# Altium PCB Arm.PcbDoc
Units mil, origin at the board's own origin, x right, y up, seen from the top; angles counter-clockwise.
Board outline 6000 x 4000 mil, 2 copper layers (Top Layer, Bottom Layer); 132 components, 95 nets, 448 pads, 0 vias.
Unrouted connection lines stored in the file: 293.
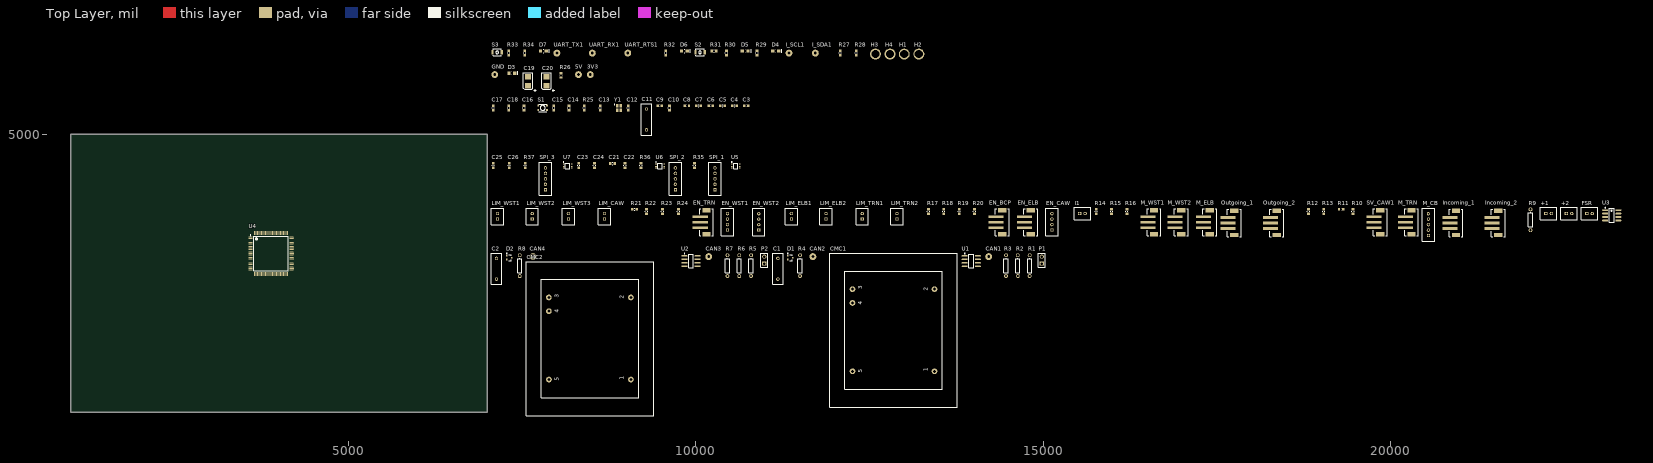
[diagram p0: Top Layer view]
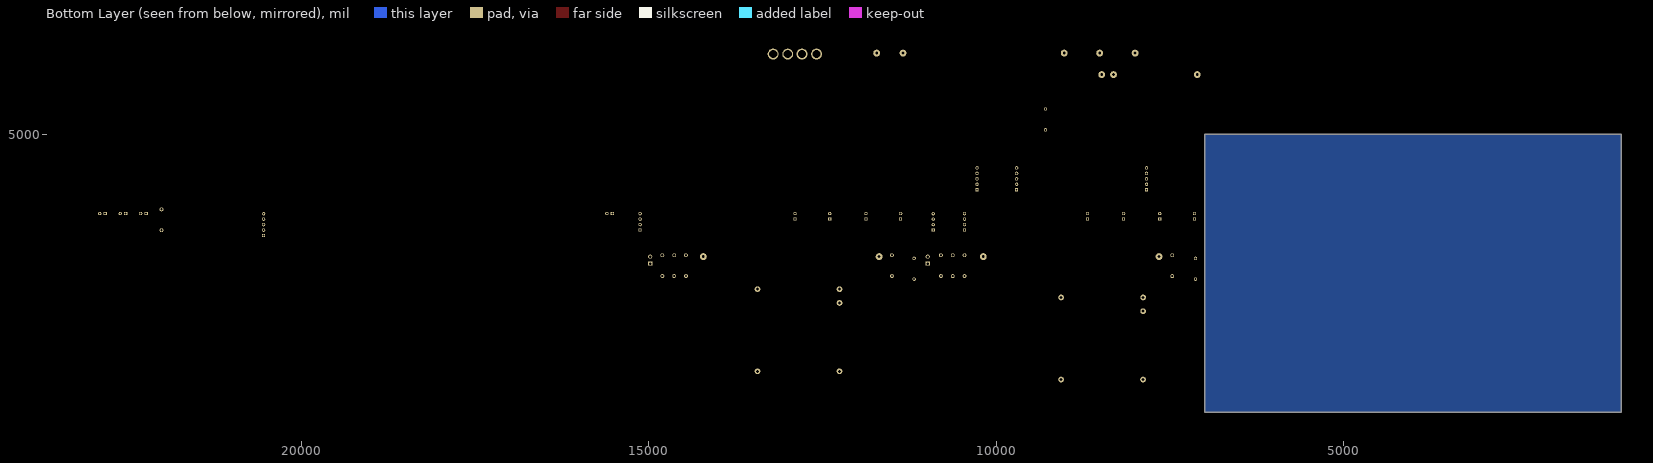
[diagram p1: Bottom Layer view, seen from below]

## Layer stack, top to bottom
Top Solder: solder mask 0.4, Solder Resist, Dk 3.5
Top Layer: signal copper 1.4
Dielectric 1: dielectric 12.6, FR-4, Dk 4.8
Bottom Layer: signal copper 1.4
Bottom Solder: solder mask 0.4, Solder Resist, Dk 3.5

## Board outline
1000,1000 7000,1000 7000,5000 1000,5000

## Design rules (kind name [scope] priority, off if disabled: settings)
BoardOutlineClearance [All] p1: gap=10 ignorepadtopadclearanceinfootprint=FALSE except(0: Arc-SplitContinuation Track-SplitContinuation SMDPad-SplitContinuation THPad-SplitContinuation Via-SplitContinuation Fill-SplitContinuation Poly-SplitContinuation Region-SplitContinuation Text-SplitContinuation)
Clearance [All] p1: gap=10 ignorepadtopadclearanceinfootprint=FALSE except(0: Arc-Hole Track-Hole SMDPad-Hole THPad-Hole Via-Hole Fill-Hole Poly-Hole Region-Hole Text-Hole)
PolygonConnect [All] p1: connectstyle=Relief reliefconductorwidth=10 reliefentries=4 polygonreliefangle="90 Angle" airgapwidth=10
RoomDefinition Support [InComponentClass('Support')] p1: confinementstyle=ConfineIn formatcopy=TRUE lockcomponents=FALSE outline 7045,6070 13295,6070 13295,6340 7045,6340
RoomDefinition POWER [InComponentClass('POWER')] p2: confinementstyle=ConfineIn formatcopy=TRUE lockcomponents=FALSE outline 7045,5600 8615,5600 8615,6020 7045,6020
RoomDefinition MCU [InComponentClass('MCU')] p3: confinementstyle=ConfineIn formatcopy=TRUE lockcomponents=FALSE outline 7045,4770 11505,4770 11505,5550 7045,5550
RoomDefinition Connectors2 [InComponentClass('Connectors2')] p4: confinementstyle=ConfineIn formatcopy=TRUE lockcomponents=FALSE outline 7045,4110 10655,4110 10655,4720 7045,4720
RoomDefinition Connectors1 [InComponentClass('Connectors1')] p5: confinementstyle=ConfineIn formatcopy=TRUE lockcomponents=FALSE outline 7045,3450 23340,3450 23340,4060 7045,4060
RoomDefinition CAN [InComponentClass('CAN')] p6: confinementstyle=ConfineIn formatcopy=TRUE lockcomponents=FALSE outline 7045,1060 15040,1060 15040,3400 7045,3400
RoutingVias [All] p1: holewidth=28 width=50 viastyle="Through Hole" minholewidth=28 minwidth=50 maxholewidth=28 maxwidth=50
SolderMaskExpansion [All] p1: expansion=4
Width [All] p1: maxlimit=10 minlimit=10 preferedwidth=10
30 further rules are at their usual default settings.

## Classes and differential pairs
component class Support: D4 D5 D6 D7 H1 H2 H3 H4 I_SCL1 I_SDA1 R27 R28 R29 R30 R31 R32 R33 R34 S2 S3 UART_RTS1 UART_RX1 UART_TX1
component class POWER: 3V3 5V C19 C20 D3 GND R26 VR1
component class MCU: C3 C4 C5 C6 C7 C8 C9 C10 C11 C12 C13 C14 C15 C16 C17 C18 R25 S1 U4 Y1
component class Connectors2: C21 C22 C23 C24 C25 C26 R35 R36 R37 SPI_1 SPI_2 SPI_3 U5 U6 U7
component class Connectors1: +1 +2 DEBUG1 EN_BCP EN_CAW EN_ELB EN_TRN EN_WST1 EN_WST2 FSR I1 Incoming_1 Incoming_2 LIM_CAW LIM_ELB1 LIM_ELB2 LIM_TRN1 LIM_TRN2 LIM_WST1 LIM_WST2 LIM_WST3 M_CB M_ELB M_TRN M_WST1 M_WST2 Outgoing_1 Outgoing_2 R9 R10 R11 R12 R13 R14 R15 R16 R17 R18 R19 R20 R21 R22 R23 R24 SV_CAW1 U3
component class CAN: C1 C2 CAN1 CAN2 CAN3 CAN4 CMC1 CMC2 D1 D2 P1 P2 R1 R2 R3 R4 R5 R6 R7 R8 U1 U2

## Components (designator, comment, footprint, x,y, rotation, side; value= is the part's Value field where it differs from the comment)
3V3 "TESTPOINT_LOOP" TESTPOINT_LOOP 8480,5860 r0 top
5V "TESTPOINT_LOOP" TESTPOINT_LOOP 8310,5860 r0 top
+1 "PWR_3V3" JST-B2B-PHSK 22275,3860 r0 top
+2 "PWR_5V" JST-B2B-PHSK 22570,3860 r0 top
C1 "Cap" RAD-0.3 11180,3065 r90 top value=0.1uF
C2 "Cap" RAD-0.3 7130,3065 r90 top value=0.1uF
C3 "CAP_4.7uF_0603" CAPC0603(1608)55_N 10725,5410 r0 top value=4.7uF
C4 "CAP_0.1uF_16V_0603" CAPC0603(1608)55_N 10555,5410 r0 top value=0.1uF
C5 "CAP_0.1uF_16V_0603" CAPC0603(1608)55_N 10385,5410 r0 top value=0.1uF
C6 "CAP_0.1uF_16V_0603" CAPC0603(1608)55_N 10215,5410 r0 top value=0.1uF
C7 "CAP_0.1uF_16V_0603" CAPC0603(1608)55_N 10040,5410 r0 top value=0.1uF
C8 "CAP_0.1uF_16V_0603" CAPC0603(1608)55_N 9870,5410 r0 top value=0.1uF
C9 "CAP_1uF_16V_0603" CAPC0603(1608)55_N 9480,5410 r0 top value=1uF
C10 "CAP_1uF_16V_0603" CAPC0603(1608)55_N 9620,5380 r90 top value=1uF
C11 "Cap" RAD-0.3 9290,5215 r90 top value=0.1uF
C12 "CAP_10nF_0603" CAPC0603(1608)55_N 9025,5380 r90 top value=0.1uF
C13 "CAP_0.1uF_16V_0603" CAPC0603(1608)55_N 8625,5380 r90 top value=0.1uF
C14 "CAP_15pF_0603" CAPC0603(1608)55_N 8175,5380 r90 top value=15pF
C15 "CAP_15pF_0603" CAPC0603(1608)55_N 7955,5380 r90 top value=15pF
C16 "CAP_0.1uF_16V_0603" CAPC0603(1608)55_N 7525,5380 r90 top value=0.1uF
C17 "CAP_4.7uF_0603" CAPC0603(1608)55_N 7085,5380 r90 top value=2.2uF
C18 "CAP_4.7uF_0603" CAPC0603(1608)55_N 7305,5380 r90 top value=2.2uF
C19 "CAP_10uF_1411_POL" AVX-CAPC3528_V 7585,5765 r90 top value=10uF
C20 "CAP_10uF_1411_POL" AVX-CAPC3528_V 7850,5765 r90 top value=10uF
C21 "SPI2_VCCA" CAPC0603(1608)55_N 8800,4580 r0 top value=0.1uF
C22 "SPI2_VCCB" CAPC0603(1608)55_N 8980,4550 r90 top value=0.1uF
C23 "SPI1_VCCA" CAPC0603(1608)55_N 8315,4550 r90 top value=0.1uF
C24 "SPI1_VCCB" CAPC0603(1608)55_N 8540,4550 r90 top value=0.1uF
C25 "SPI4_VCCA" CAPC0603(1608)55_N 7085,4550 r90 top value=0.1uF
C26 "SPI4_VCCB" CAPC0603(1608)55_N 7315,4550 r90 top value=0.1uF
CAN1 "TESTPOINT_LOOP" TESTPOINT_LOOP 14215,3240 r90 top
CAN2 "TESTPOINT_LOOP" TESTPOINT_LOOP 11685,3240 r90 top
CAN3 "TESTPOINT_LOOP" TESTPOINT_LOOP 10185,3240 r90 top
CAN4 "TESTPOINT_LOOP" TESTPOINT_LOOP 7655,3240 r90 top
CMC1 "CMC" TRF_5 12845,2180 r90 top
CMC2 "CMC" TRF_5 8474.58,2060.83 r90 top
D1 "" NXP-SOT323-3 11360,3225 r0 top
D2 "" NXP-SOT323-3 7315,3225 r0 top
D3 "LED_G" LED_0805_LINE 7350,5880 r0 top
D4 "DIO_LED_Y" LED_0805_LINE 11150,6200 r0 top
D5 "DIO_LED_G" LED_0805_LINE 10710,6200 r0 top
D6 "DIO_LED_G" LED_0805_LINE 9835,6200 r0 top
D7 "DIO_LED_G" LED_0805_LINE 7805,6200 r0 top
EN_BCP "E_BIC" JST-B3B-SM4-TB 14510,3735 r90 top
EN_CAW "CON_4M" JST-B4B-PHSK 15125,3740 r90 top
EN_ELB "E_ELB" JST-B3B-SM4-TB 14920,3735 r90 top
EN_TRN "E_TUR" JST-B3B-SM4-TB 10250,3735 r90 top
EN_WST1 "CON_4M" JST-B4B-PHSK 10455,3740 r90 top
EN_WST2 "CON_4M" JST-B4B-PHSK 10905,3740 r90 top
FSR "FSR" JST-B2B-PHSK 22865,3860 r0 top
GND "TESTPOINT_LOOP" TESTPOINT_LOOP 7105,5860 r0 top
H1 "H1" MOUNTING_HOLE 13000,6155 r0 top
H2 "H2" MOUNTING_HOLE 13210,6155 r0 top
H3 "H4" MOUNTING_HOLE 12585,6155 r0 top
H4 "H3" MOUNTING_HOLE 12795,6155 r0 top
I1 "I2C_CON" JST-B2B-PHSK 15565,3860 r0 top
I_SCL1 "" TESTPOINT_LOOP 11340,6170 r90 top
I_SDA1 "" TESTPOINT_LOOP 11720,6170 r90 top
Incoming_1 "CAN1A" JST-B3B-SM4-TB 21040,3725 r90 top
Incoming_2 "CAN2A" JST-B3B-SM4-TB 21650,3725 r90 top
LIM_CAW "LIM_CL1" JST-B2B-PHSK 8685,3820 r90 top
LIM_ELB1 "LIM_TU2" JST-B2B-PHSK 11375,3820 r90 top
LIM_ELB2 "LIM_TU2" JST-B2B-PHSK 11875,3820 r90 top
LIM_TRN1 "LIM_TU1" JST-B2B-PHSK 12395,3820 r90 top
LIM_TRN2 "LIM_TU2" JST-B2B-PHSK 12895,3820 r90 top
LIM_WST1 "LIM_WR1" JST-B2B-PHSK 7145,3820 r90 top
LIM_WST2 "LIM_WR2" JST-B2B-PHSK 7645,3820 r90 top
LIM_WST3 "LIM_WR3" JST-B2B-PHSK 8165,3820 r90 top
M_CB "M_CB" JST-B5B-PHSK 20545,3700 r90 top
M_ELB "M_ELB" JST-B3B-SM4-TB 17495,3735 r90 top
M_TRN "M_TUR" JST-B3B-SM4-TB 20400,3735 r90 top
M_WST1 "M_WR1" JST-B3B-SM4-TB 16695,3735 r90 top
M_WST2 "M_WR2" JST-B3B-SM4-TB 17085,3735 r90 top
Outgoing_1 "CAN1B" JST-B3B-SM4-TB 17850,3725 r90 top
Outgoing_2 "CAN2B" JST-B3B-SM4-TB 18460,3725 r90 top
P1 "CAN1" HDR1X2 14980,3140 r90 top
P2 "CAN2" HDR1X2 10985,3140 r90 top
R1 "Termination_Resistor" AXIAL-0.3 14805,3110 r90 top value=120R
R2 "Res1" AXIAL-0.3 14635,3110 r90 top value=0K
R3 "Res1" AXIAL-0.3 14465,3110 r90 top value=0R
R4 "Res1" AXIAL-0.3 11500,3110 r90 top value=0K
R5 "Termination_Resistor" AXIAL-0.3 10795,3110 r90 top value=120R
R6 "Res1" AXIAL-0.3 10625,3110 r90 top value=0K
R7 "Res1" AXIAL-0.3 10455,3110 r90 top value=0R
R8 "Res1" AXIAL-0.3 7465,3110 r90 top value=0K
R9 "" AXIAL-0.3 22015,3770 r90 top value=47K
R10 "RES_10K_0603" RESC0603(1608)_N 19460,3890 r90 top value=10K
R11 "RES_10K_0603" RESC0603(1608)_N 19290,3920 r0 top value=10K
R12 "RES_10K_0603" RESC0603(1608)_N 18820,3890 r90 top value=10K
R13 "RES_10K_0603" RESC0603(1608)_N 19040,3890 r90 top value=10K
R14 "RES_10K_0603" RESC0603(1608)_N 15765,3890 r90 top value=10K
R15 "RES_10K_0603" RESC0603(1608)_N 15985,3890 r90 top value=10K
R16 "RES_10K_0603" RESC0603(1608)_N 16205,3890 r90 top value=10K
R17 "RES_10K_0603" RESC0603(1608)_N 13350,3890 r90 top value=10K
R18 "RES_10K_0603" RESC0603(1608)_N 13570,3890 r90 top value=10K
R19 "RES_10K_0603" RESC0603(1608)_N 13790,3890 r90 top value=10K
R20 "RES_10K_0603" RESC0603(1608)_N 14010,3890 r90 top value=10K
R21 "RES_10K_0603" RESC0603(1608)_N 9115,3920 r0 top value=10K
R22 "RES_10K_0603" RESC0603(1608)_N 9290,3890 r90 top value=10K
R23 "RES_10K_0603" RESC0603(1608)_N 9520,3890 r90 top value=10K
R24 "RES_10K_0603" RESC0603(1608)_N 9750,3890 r90 top value=10K
R25 "RES_0R_0603" RESC0603(1608)_N 8395,5380 r90 top value=0R
R26 "RES_100R_0603" RESC0603(1608)_N 8060,5850 r90 top value=100R
R27 "RES_4K7_0603" RESC0603(1608)_N 12080,6170 r90 top value=4K7
R28 "RES_4K7_0603" RESC0603(1608)_N 12310,6170 r90 top value=4K7
R29 "RES_100R_0603" RESC0603(1608)_N 10880,6170 r90 top value=100R
R30 "RES_100R_0603" RESC0603(1608)_N 10440,6170 r90 top value=100R
R31 "RES_10K_0603" RESC0603(1608)_N 10260,6200 r0 top value=10K
R32 "RES_100R_0603" RESC0603(1608)_N 9565,6170 r90 top value=100R
R33 "RES_100R_0603" RESC0603(1608)_N 7305,6170 r90 top value=100R
R34 "RES_10K_0603" RESC0603(1608)_N 7535,6170 r90 top value=10K
R35 "RES_1K_0603" RESC0603(1608)_N 9980,4550 r90 top value=10K
R36 "RES_1K_0603" RESC0603(1608)_N 9210,4550 r90 top value=10K
R37 "RES_1K_0603" RESC0603(1608)_N 7545,4550 r90 top value=10K
S1 "SW_PWR" PTS830GM140 7795,5380 r0 top
S2 "SW_TACTILE" B3U-1100P 10060,6180 r0 top
S3 "SW_TACTILE" B3U-1100P 7140,6180 r0 top
SPI_1 "SPI_2" JST-B5B-PHSK 10275,4360 r90 top
SPI_2 "SPI_1" JST-B5B-PHSK 9705,4360 r90 top
SPI_3 "SPI_4" JST-B5B-PHSK 7835,4360 r90 top
SV_CAW1 "SV_CLA" JST-B3B-SM4-TB 19950,3735 r90 top
U1 "IC TXRX CAN" LT-S8_N 13965,3175 r0 top
U2 "IC TXRX CAN" LT-S8_N 9930,3175 r0 top
U3 "CA3140AMZ" CA3140AMZ 23185,3835 r0 top
U4 "STM32F446VET7" STM-LQFP100_L 3885,3285 r0 top
U5 "LVL_SHIFTER" DCU0008A_L 10575,4545 r0 top
U6 "LVL _SHIFTER" DCU0008A_L 9485,4545 r0 top
U7 "LVL_SHIFTER" DCU0008A_L 8155,4545 r0 top
UART_RTS1 "" TESTPOINT_LOOP 9020,6170 r90 top
UART_RX1 "" TESTPOINT_LOOP 8510,6170 r90 top
UART_TX1 "" TESTPOINT_LOOP 8000,6170 r90 top
Y1 "CRYSTAL_32MHZ" AVX-CX2520DB32000D0GEJZ1-4_V 8895,5380 r0 top

## Footprints (in the part's own frame and the unit in brackets; to place one, negate y for a bottom-side part, rotate by r counter-clockwise, add the part's x,y. Pads: shape width x height; smd on the part's side, far side on the other; paste and mask are expansions set on the pad)
AVX-CAPC3528_V [mm] "SMT Capacitor, 2 Leads, Body 3.5x2.8mm"
  rect 2x2.2 smd: 1(-1.6,0) 2(1.6,0)
  silkscreen extent -3.87,-3.05 3.05,1.7, body extent -1.79,-1.54 1.8,1.54, height 1.9
AVX-CX2520DB32000D0GEJZ1-4_V [mm] "Hand Drawn, 4-Leads,Body 2.5x2mm"
  rect 1x1.2 smd: 1(-0.65,0.85) 2(-0.65,-0.85) 3(0.65,-0.85) 4(0.65,0.85)
  silkscreen extent -1.82,1.13 -1.58,1.38, body extent -1,-1.25 1,1.25, height 0.55
AXIAL-0.3 [mm] "Axial Device, Thru-Hole; 2 Leads; 0.3 in Pin Spacing"
  round 1.4 hole 0.85: 1(-3.81,0) 2(3.81,0)
  silkscreen extent -2.77,-0.76 2.77,0.76
B3U-1100P [mm] "TACTILE SWITCH GREY"
  rect 0.8x1.7 smd: 1(-1.7,0) 2(1.7,0)
  silkscreen extent -1.5,-1.25 1.5,1.25
CA3140AMZ [mm]
  oval 2.2x0.6 smd: 1(-2.4,1.905) 2(-2.4,0.635) 3(-2.4,-0.635) 4(-2.4,-1.905) 5(2.4,-1.905) 6(2.4,-0.635) 7(2.4,0.635) 8(2.4,1.905)
  silkscreen extent -2.52,-2.5 0.9,2.88, body extent -2,-2.5 2,2.5, height 1.75
CAPC0603(1608)55_N [mm] "Chip Capacitor, Body 1.6x0.8mm, Height 0.55mm, IPC Medium Density"
  rect 0.9x1 smd: 1(-0.8,0) 2(0.8,0)
  silkscreen extent -0.05,-0.4 0.05,0.4, body extent -0.87,-0.48 0.88,0.47, height 0.55
DCU0008A_L [mm] "SOP, 8-Leads, Body 2.4x2.1mm, Pitch 0.5mm, IPC High Density"
  rrect40% 0.6x0.25 smd: 1(-1.5,0.75) 2(-1.5,0.25) 3(-1.5,-0.25) 4(-1.5,-0.75) 5(1.5,-0.75) 6(1.5,-0.25) 7(1.5,0.25) 8(1.5,0.75)
  silkscreen extent -1.62,-1.05 0.8,1.55, body extent -1.56,-1 1.56,1, height 0.9
HDR1X2 [mm] "Connector; Header; 2 Position"
  rect 1.5x1.5 hole 0.9: 1(0,0)
  round 1.5 hole 0.9: 2(2.54,0)
  silkscreen extent -1.27,-1.27 3.81,1.27
JST-B2B-PHSK [mm]
  rect 1.162x1.162 / inner rect 1.524x1.524 / far side rect 1.162x1.162 hole 0.7: 1(-1,0)
  round 1.2 / inner round 1.524 / far side round 1.2 hole 0.7: 2(1,0)
  silkscreen extent -3,-2.25 3,2.25
JST-B3B-SM4-TB [mm]
  rect 1x5.5 smd: 1(-2,4.75) 2(0,4.75) 3(2,4.75)
  rect 1.6x3 smd: 4(-4.4,2.5) 5(4.4,2.5)
  silkscreen extent -5,0 5,5
JST-B4B-PHSK [mm]
  rect 1.162x1.162 / inner rect 1.524x1.524 / far side rect 1.162x1.162 hole 0.7: 1(-3,0)
  round 1.2 / inner round 1.524 / far side round 1.2 hole 0.7: 2(-1,0) 3(1,0) 4(3,0)
  silkscreen extent -5,-2.25 5,2.25
JST-B5B-PHSK [mm]
  rect 1.162x1.162 / inner rect 1.524x1.524 / far side rect 1.162x1.162 hole 0.7: 1(-4,0)
  round 1.2 / inner round 1.524 / far side round 1.2 hole 0.7: 2(-2,0) 3(0,0) 4(2,0) 5(4,0)
  silkscreen extent -6,-2.25 6,2.25
LED_0805_LINE [mm] "SMD, 2-Leads, Body 2x1.25mm"
  rect 1.2x1.2 smd: 1(-1.05,0) 2(1.05,0)
  silkscreen extent -0.05,-0.64 2.16,0.64, body extent -1,-0.63 1,0.63, height 0.8
LT-S8_N [mm] "SOP, 8-Leads, Body 4.9x3.9mm, Pitch 1.27mm, IPC Medium Density"
  oval 2.2x0.6 smd: 1(-2.4,1.905) 2(-2.4,0.635) 3(-2.4,-0.635) 4(-2.4,-1.905) 5(2.4,-1.905) 6(2.4,-0.635) 7(2.4,0.635) 8(2.4,1.905)
  silkscreen extent -2.52,-2.5 0.9,2.88, body extent -2,-2.5 2,2.5, height 1.76
MOUNTING_HOLE [mm]
  round 4 hole 3 unplated: 0(0,0)
NXP-SOT323-3 [mm] "SOT23, 3-Leads, Body 2.2x1.35mm, Pitch 0.65mm"
  rect 0.55x0.6 smd paste-1: 1(-0.925,0.65) 2(-0.925,-0.65) 3(0.925,0)
  silkscreen extent -1.05,-1.1 0.67,1.62, body extent -1.15,-1.1 1.15,1.1, height 1.1
PTS830GM140 [mm] "PWR TACTILE SWITCH (RED)"
  rect 0.7x0.75 smd: 1(-1.625,0.825) 2(1.625,0.825) 3(-1.625,-0.825) 4(1.625,-0.825)
  silkscreen extent -1.53,-1.4 1.53,1.4
RAD-0.3 [mm] "Radial Cap, Thru-Hole; 2 Leads; 0.3 in Pin Spacing"
  round 1.2 hole 0.7: 1(-3.81,0) 2(3.81,0)
  silkscreen extent -5.71,-1.91 5.71,1.91
RESC0603(1608)_N [mm] "Chip Resistor, Body 1.6x0.8mm, IPC Medium Density"
  rect 0.9x1 smd: 1(-0.8,0) 2(0.8,0)
  silkscreen extent -0.05,-0.4 0.05,0.4, body extent -0.85,-0.47 0.85,0.47, height 0.6
STM-LQFP100_L [mm] "Thin QFP, 100-Leads, Body 14x14mm, Pitch 0.5mm, IPC High Density"
  oval 1.55x0.25 smd: 1(-7.525,6) 2(-7.525,5.5) 3(-7.525,5) 4(-7.525,4.5) 5(-7.525,4) 6(-7.525,3.5) 7(-7.525,3) 8(-7.525,2.5) 9(-7.525,2) 10(-7.525,1.5) 11(-7.525,1) 12(-7.525,0.5) 13(-7.525,0) 14(-7.525,-0.5) 15(-7.525,-1) 16(-7.525,-1.5) 17(-7.525,-2) 18(-7.525,-2.5) 19(-7.525,-3) 20(-7.525,-3.5) 21(-7.525,-4) 22(-7.525,-4.5) 23(-7.525,-5) 24(-7.525,-5.5) 25(-7.525,-6) 51(7.525,-6) 52(7.525,-5.5) 53(7.525,-5) 54(7.525,-4.5) 55(7.525,-4) 56(7.525,-3.5) 57(7.525,-3) 58(7.525,-2.5) 59(7.525,-2) 60(7.525,-1.5) 61(7.525,-1) 62(7.525,-0.5) 63(7.525,0) 64(7.525,0.5) 65(7.525,1) 66(7.525,1.5) 67(7.525,2) 68(7.525,2.5) 69(7.525,3) 70(7.525,3.5) 71(7.525,4) 72(7.525,4.5) 73(7.525,5) 74(7.525,5.5) 75(7.525,6)
  oval 0.25x1.55 smd: 26(-6,-7.525) 27(-5.5,-7.525) 28(-5,-7.525) 29(-4.5,-7.525) 30(-4,-7.525) 31(-3.5,-7.525) 32(-3,-7.525) 33(-2.5,-7.525) 34(-2,-7.525) 35(-1.5,-7.525) 36(-1,-7.525) 37(-0.5,-7.525) 38(0,-7.525) 39(0.5,-7.525) 40(1,-7.525) 41(1.5,-7.525) 42(2,-7.525) 43(2.5,-7.525) 44(3,-7.525) 45(3.5,-7.525) 46(4,-7.525) 47(4.5,-7.525) 48(5,-7.525) 49(5.5,-7.525) 50(6,-7.525) 76(6,7.525) 77(5.5,7.525) 78(5,7.525) 79(4.5,7.525) 80(4,7.525) 81(3.5,7.525) 82(3,7.525) 83(2.5,7.525) 84(2,7.525) 85(1.5,7.525) 86(1,7.525) 87(0.5,7.525) 88(0,7.525) 89(-0.5,7.525) 90(-1,7.525) 91(-1.5,7.525) 92(-2,7.525) 93(-2.5,7.525) 94(-3,7.525) 95(-3.5,7.525) 96(-4,7.525) 97(-4.5,7.525) 98(-5,7.525) 99(-5.5,7.525) 100(-6,7.525)
  silkscreen extent -7.65,-6.35 6.35,6.8, body extent -7,-7 7,7, height 1.6
TESTPOINT_LOOP [mm]
  round 2.5 hole 1: 1(0,0)
TRF_5 [mil] "Transformer; 5 Leads"
  round 82 hole 42: 1(-590.83,-590.42) 2(590.83,-590.42) 3(590.83,590.42) 4(393.33,590.42) 5(-590.83,589.58)
  silkscreen extent -1108,-917 1108,916

## Part data
3V3 5V CAN1 CAN2 CAN3 CAN4 GND: "Loop testpoint through-hole pad"
+1 +2 FSR I1 LIM_CAW LIM_ELB1 LIM_ELB2 LIM_TRN1 LIM_TRN2 LIM_WST1 LIM_WST2 LIM_WST3: library part CON_2M
C1 C2 C11: "Capacitor", LatestRevisionDate=17-Jul-2002, LatestRevisionNote="Re-released for DXP Platform.", PackageDescription="Radial Cap, Thru-Hole; 2 Leads; 0.3 in Pin Spacing", PackageReference=RAD-0.3, Published=8-Jun-2000, Publisher="Altium Limited"
C3 C17 C18: "CAP CER 4.7UF 6.3V X5R 0603", Digikey Part Number=311-1521-1-ND, Manufacturer=Yageo, MPN=CC0603KRX5R5BB475, Package="0603 (1608 Metric)", Temperature Coefficient=X5R, Voltage Rating=6.3V, Dimensions="0.063\" L x 0.031\" W (1.60mm x 0.80mm)"
C4 C5 C6 C7 C8 C13 C16: "CAP CER 0.1UF 16V X7R 0603", Digikey Part Number=311-1088-1-ND, Manufacturer=Yageo, MPN=CC0603KRX7R7BB104, Package="0603 (1608 Metric)", Temperature Coefficient=X7R, Voltage Rating=16V, Dimensions="0.063\" L x 0.031\" W (1.60mm x 0.80mm)"
C9 C10: "CAP CER 1UF 16V Y5V 0603", Digikey Part Number=311-1372-1-ND, Manufacturer=Yageo, MPN=CC0603ZRY5V7BB105, Package="0603 (1608 Metric)", Temperature Coefficient=Y5V, Voltage Rating=16V, Dimensions="0.063\" L x 0.031\" W (1.60mm x 0.80mm)"
C12: "CAP CER 10000PF 16V X7R 0603", Digikey Part Number=311-3369-1-ND, Manufacturer=Yageo, MPN=CC0603KRX7R7BB103, Package="0603 (1608 Metric)", Temperature Coefficient=X7R, Voltage Rating=16V, Dimensions="0.063\" L x 0.031\" W (1.60mm x 0.80mm)"
C14 C15: "CAP CER 15PF 250V NPO 0603", Digikey Part Number=311-3282-1-ND, Manufacturer=Yageo, MPN=AC0603JRNPOYBN150, Package="0603 (1608 Metric)", Temperature Coefficient=NP0, Voltage Rating=250v, Dimensions="0.063\" L x 0.031\" W (1.60mm x 0.80mm)"
C19 C20: "CAP TANT 10UF 20% 10V 1411", Digikey Part Number=478-12047-1-ND, Manufacturer="AVX Corporation", MPN=F971A106MBAHT3, Package="1411 (3528 Metric)", Voltage Rating=10V, Dimensions="0.063\" L x 0.031\" W (1.60mm x 0.80mm)"
C21 C22 C23 C24 C25 C26: library part CAP_0.1uF_16V_0603, "CAP CER 0.1UF 16V X7R 0603", Digikey Part Number=311-1088-1-ND, Manufacturer=Yageo, MPN=CC0603KRX7R7BB104, Package="0603 (1608 Metric)", Temperature Coefficient=X7R, Dimensions="0.063\" L x 0.031\" W (1.60mm x 0.80mm)"
CMC1 CMC2: "Common Mode Choke", Supplier Part Number 1=DR331-513AECT-ND, Supplier 1=Digi-Key
D1 D2: library part TVS_DIODE_CAN, "TVS DIODE 24V 41V SOT323-3", Digikey Part Number=1727-3891-1-ND, Manufacturer="Nexperia USA Inc.", MPN=PESD2CAN,215, Package="SC-70, SOT-323", ComponentLink1Description=Datasheet, ComponentLink1URL=https://assets.nexperia.com/documents/data-sheet/PESD1CAN-U.pdf, Name=TVS_DIODE_CAN
D3: library part DIO_LED_G, "LED GREEN DIFFUSED 0805 SMD", Digikey Part Number=475-1410-1-ND, Forward Voltage Drop=2.2V, Manufacturer=OSRAM, MPN="LG R971-KN-1", Package="0805 (2012 Metric)"
D4: "LED YELLOW DIFFUSED 0805 SMD", Digikey Part Number=475-2560-1-ND, Forward Voltage Drop=2.2V, Manufacturer=OSRAM, MPN="LY R976-PS-36", Package="0805 (2012 Metric)"
D5 D6 D7: "LED GREEN DIFFUSED 0805 SMD", Digikey Part Number=475-1410-1-ND, Forward Voltage Drop=2.2V, Manufacturer=OSRAM, MPN="LG R971-KN-1", Package="0805 (2012 Metric)"
EN_BCP EN_ELB EN_TRN Incoming_1 Incoming_2 M_ELB M_TRN M_WST1 M_WST2 Outgoing_1 Outgoing_2 SV_CAW1: library part CON_3M
  M_ELB M_TRN M_WST1 M_WST2: Motor Driver=MD30C
H1 H2 H3 H4: library part MOUNTING_HOLES, "6cm x 6cm"
I_SCL1 I_SDA1 UART_RTS1 UART_RX1 UART_TX1: library part TESTPOINT_LOOP, "Loop testpoint through-hole pad"
M_CB SPI_1 SPI_2 SPI_3: library part CON_5M
  M_CB: Motor Driver=MDD10A
P1 P2: library part "Header 2", "Header, 2-Pin", LatestRevisionDate=17-Jul-2002, LatestRevisionNote="Re-released for DXP Platform.", Publisher="Altium Limited"
R1 R5 R9: library part Res1, "Resistor", LatestRevisionDate=17-Jul-2002, LatestRevisionNote="Re-released for DXP Platform.", PackageDescription="Axial Device, Thru-Hole; 2 Leads; 0.3 in Pin Spacing", PackageReference=AXIAL-0.3, Published=8-Jun-2000, Publisher="Altium Limited"
R2 R3 R4 R6 R7 R8: "Resistor", LatestRevisionDate=17-Jul-2002, LatestRevisionNote="Re-released for DXP Platform.", PackageDescription="Axial Device, Thru-Hole; 2 Leads; 0.3 in Pin Spacing", PackageReference=AXIAL-0.3, Published=8-Jun-2000, Publisher="Altium Limited"
R10 R11 R12 R13 R14 R15 R16 R17 R18 R19 R20 R21 R22 R23 R24 R31 R34: "RES SMD 10K OHM 5% 1/10W 0603", Digikey Part Number=311-10KGRCT-ND, Manufacturer=Yageo, MPN=RC0603JR-0710KL, Package="0603 (1608 Metric)", Tolerance=5%, Dimensions="0.063\" L x 0.031\" W (1.60mm x 0.80mm)"
R25: "RES SMD 0 OHM JUMPER 1/10W 0603", Digikey Part Number=311-0.0GRCT-ND, Manufacturer=Yageo, MPN=RC0603JR-070RL, Package="0603 (1608 Metric)", Dimensions="0.063\" L x 0.031\" W (1.60mm x 0.80mm)"
R26 R29 R30 R32 R33: "RES SMD 100 OHM 1% 1/10W 0603", Digikey Part Number=311-100HRCT-ND, Manufacturer=Yageo, MPN=RC0603FR-07100RL, Package="0603 (1608 Metric)", Tolerance=1%, Dimensions="0.063\" L x 0.031\" W (1.60mm x 0.80mm)"
R27 R28: "RES SMD 4.7K OHM 5% 1/10W 0603", Digikey Part Number=311-4.7KGRCT-ND, Manufacturer=Yageo, MPN=RC0603JR-074K7L, Package="0603 (1608 Metric)", Tolerance=5%, Dimensions="0.063\" L x 0.031\" W (1.60mm x 0.80mm)"
R35 R36 R37: "RES SMD 1K OHM 5% 1/10W 0603", Digikey Part Number=311-1.0KGRCT-ND, Manufacturer=Yageo, MPN=RC0603JR-071KL, Package="0603 (1608 Metric)", Tolerance=5%, Dimensions="0.063\" L x 0.031\" W (1.60mm x 0.80mm)"
S1: "Power Switch (Red)", Digikey Part Number=CKN10587CT-ND, Manufacturer=C&K, MPN="PTS830GM140 SMTR LFS", ComponentLink1Description=Datasheet, ComponentLink1URL=https://www.ckswitches.com/media/1478/pts830.pdf
S2 S3: "Tactile Switch (Grey)", Digikey Part Number=SW1021TR-ND, Manufacturer="Omron Electronics Inc-EMC Div", MPN=B3U-1100P
U1 U2: library part LTC2875, "IC TXRX CAN 4MBPS 8SO", Digikey Part Number=LTC2875IS8#PBF-ND, Manufacturer="Linear Technologies", MPN=LTC2875IS8#PBF, Package="8-SOIC (0.154\", 3.90mm Width)", ComponentLink1Description=Datasheet, ComponentLink1URL=https://www.analog.com/media/en/technical-documentation/data-sheets/2875f.pdf
U3: "4.5MHz, BiMOS Operational Amplifier with MOSFET Input/Bipolar Output", Digikey Part Number=CA3140AMZ-ND, Manufacturer="Renesas Electronics America Inc.", MPN=CA3140AMZ
U4: library part CMP-0243-00221-1, "ARM Cortex-M4 32-bit MCU+FPU, 512 KB Flash, 128 KB Internal RAM, 81 I/Os, 100-Pin LQFP, -40 to 105 degC, Tray", I/Os (High Current)=81, Operating Frequency(F) (Processor speed) (MHz)=180, Package Description=LQFP100, Package Reference="100-Pin Low Profile Quad Flat Package, Body 14 x 14 mm, Pitch 0.5 mm", Supply Voltage(Vcc) min (V)=1.7, ComponentLink1Description="Manufacturer URL", ComponentLink1URL=http://www.st.com/, ComponentLink2Description=Datasheet, ComponentLink2URL=http://www.st.com/st-web-ui/static/active/en/resource/technical/document/datasheet/DM00141306.pdf, Core="ARM Cortex-M4", D/A Converter=2, DatasheetVersion="Rev. 6", FLASH Size (Prog) (kB)=512, Internal RAM Size (kB)=128, Mounting Technology="Surface Mount", Packing=Tray
U5 U6 U7: library part CMP-0859-00013-4, "Dual-Bit Dual Supply Transceiver with Configurable Voltage Translation and 3-State Outputs, DCU0008A, LARGE T&R", F @ Nom Voltage(Max)(Mhz)=150, Generic Part Number=SN74LVC2T45, ICC @ Nom Voltage(Max)(mA)=0.004, Manufacturer="Texas Instruments", Operating Temperature Range(C)="-40 to 85", Rating=Military, tpd @ Nom Voltage(Max)(ns)=17.7,10.3,8.3,7.2, Voltage(Nom)(V)=1.8,2.5,3.3,5, 3-State Output=Yes, Bits(#)=2, DatasheetVersion=SCES516J, Input Type=CMOS/TTL, Logic=True, Output Drive (IOL/IOH)(Max)(mA)=32/-32, Output Type=CMOS, PackageReference=DCU0008A, Schmitt Trigger=No, Sub-Family="Dual Supply Translator", Technology Family=LVC, VCC(Max)(V)=5.5, VCC(Min)(V)=1.65
Y1: "CRYSTAL 32MHZ 8PF SMD", Digikey Part Number=1253-1730-1-ND, Manufacturer="Kyocera International Inc. Electronic Components", MPN=CX2520DB32000D0GPSC1, Package="4-SMD, No Lead", Dimensions="0.098\" L x 0.079\" W (2.50mm x 2.00mm)"

## Nets (pads, with @x,y where several pads share a name; then routed paths per layer and width w, separated by ;. In a path a pad name is that pad's centre, name@x,y a point inside that pad or via, vN(x,y) a via of type N, cw(c..) or ccw(c..) an arc to the next point about the centre after c; other vN are vias at no path point)
3V3: C21.2 C22.2 C23.2 C24.2 C25.2 C26.2 R35.1 R36.1 R37.1 SPI_1.5 SPI_2.5 SPI_3.5 U5.1 U6.1 U7.1
5V: U5.8 U6.8 U7.8
+3V3: 3V3.1 +1.1 C1.2 C2.2 C3.2 C4.2 C5.2 C6.2 C7.2 C8.2 C9.2 C10.2 C11.2 C12.2 C13.2 C20.1 R17.2 R18.2 R19.2 R20.2 R21.2 R22.2 R23.2 R24.2 R26.2 R27.2 R28.2 R31.1 R34.2 U1.3 U2.3 U4.6 U4.11 U4.19 U4.21 U4.22 U4.28 U4.50 U4.75 U4.100
+5V0: 5V.1 +2.1 C19.1 EN_BCP.1 EN_CAW.3 EN_ELB.1 EN_TRN.1 EN_WST1.3 EN_WST2.3 FSR.1 SV_CAW1.2 U3.7
GND: +1.2 +2.2 C1.1 C2.1 C3.1 C4.1 C5.1 C6.1 C7.1 C8.1 C9.1 C10.1 C11.1 C12.1 C13.1 C14.1 C15.1 C16.1 C17.1 C18.1 C19.2 C20.2 C21.1 C22.1 C23.1 C24.1 C25.1 C26.1 D1.3 D2.3 D3.2 D4.2 D5.2 D6.2 D7.2 EN_BCP.3 EN_CAW.4 EN_ELB.3 EN_TRN.3 EN_WST1.4 EN_WST2.4 GND.1 Incoming_1.3 Incoming_2.3 LIM_CAW.2 LIM_ELB1.2 LIM_ELB2.2 LIM_TRN1.2 LIM_TRN2.2 LIM_WST1.2 LIM_WST2.2 LIM_WST3.2 M_CB.5 M_ELB.1 M_TRN.1 M_WST1.1 M_WST2.1 Outgoing_1.3 Outgoing_2.3 R3.2 R7.2 R9.1 R10.1 R11.1 R12.1 R13.1 R14.1 R15.1 R16.1 S1.1 S2.2 S3.2 SPI_1.1 SPI_2.1 SPI_3.1 SV_CAW1.3 U1.2 U2.2 U3.4 U4.10 U4.20 U4.27 U4.37 U4.49 U4.74 U4.94 U4.99 U5.4 U6.4 U7.4 Y1.2
NetC14_2: C14.2 R25.2 Y1.1
NetC15_2: C15.2 U4.13 Y1.3
NetC16_2: C16.2 S1.4 U4.14
NetC17_2: C17.2 U4.73
NetC18_2: C18.2 U4.48
NetCAN1_1: CAN1.1 CMC1.5 Incoming_1.1 Outgoing_1.1 P1.1 R2.2
NetCAN2_1: CAN2.1 CMC1.2 Incoming_1.2 Outgoing_1.2 R1.1 R4.2
NetCAN3_1: CAN3.1 CMC2.5 Incoming_2.1 Outgoing_2.1 P2.1 R6.2
NetCAN4_1: CAN4.1 CMC2.2 Incoming_2.2 Outgoing_2.2 R5.1 R8.2
NetCMC1_1: CMC1.1 D1.1 R4.1 U1.6
NetCMC1_3: CMC1.3 D1.2 R2.1 U1.7
NetCMC2_1: CMC2.1 D2.1 R8.1 U2.6
NetCMC2_3: CMC2.3 D2.2 R6.1 U2.7
NetD3_1: D3.1 R26.1
NetD4_1: D4.1 R29.2
NetD5_1: D5.1 R30.2
NetD6_1: D6.1 R32.2
NetD7_1: D7.1 R33.2
NetDEBUG1_2: U4.39 UART_TX1.1
NetDEBUG1_3: U4.38 UART_RX1.1
NetDEBUG1_4: U4.65 UART_RTS1.1
NetDEBUG1_6: U4.72
NetDEBUG1_7: U4.76
NetEN_BCP_2: EN_BCP.2 U4.63
NetEN_CAW_1: EN_CAW.1 U4.40
NetEN_CAW_2: EN_CAW.2 U4.42
NetEN_ELB_2: EN_ELB.2 U4.4
NetEN_TRN_2: EN_TRN.2 U4.53
NetEN_WST1_1: EN_WST1.1 U4.23
NetEN_WST1_2: EN_WST1.2 U4.24
NetEN_WST2_1: EN_WST2.1 U4.90
NetEN_WST2_2: EN_WST2.2 U4.64
NetFSR_2: FSR.2 R9.2 U3.3
NetI1_1: I1.1 I_SDA1.1 R27.1 U4.93
NetI1_2: I1.2 I_SCL1.1 R28.1 U4.92
NetLIM_CAW_1: LIM_CAW.1 R24.1 U4.80
NetLIM_ELB1_1: LIM_ELB1.1 R17.1 U4.81
NetLIM_ELB2_1: LIM_ELB2.1 R18.1 U4.88
NetLIM_TRN1_1: LIM_TRN1.1 R19.1 U4.83
NetLIM_TRN2_1: LIM_TRN2.1 R20.1 U4.84
NetLIM_WST1_1: LIM_WST1.1 R21.1 U4.85
NetLIM_WST2_1: LIM_WST2.1 R22.1 U4.86
NetLIM_WST3_1: LIM_WST3.1 R23.1 U4.87
NetM_CB_1: M_CB.1 U4.55
NetM_CB_2: M_CB.2 R12.2 U4.59
NetM_CB_3: M_CB.3 U4.56
NetM_CB_4: M_CB.4 R13.2 U4.60
NetM_ELB_2: M_ELB.2 R16.2 U4.62
NetM_ELB_3: M_ELB.3 U4.58
NetM_TRN_2: M_TRN.2 R11.2 U4.61
NetM_TRN_3: M_TRN.3 U4.57
NetM_WST1_2: M_WST1.2 R14.2 U4.95
NetM_WST1_3: M_WST1.3 U4.97
NetM_WST2_2: M_WST2.2 R15.2 U4.96
NetM_WST2_3: M_WST2.3 U4.98
NetP1_2: P1.2 R1.2
NetP2_2: P2.2 R5.2
NetR3_1: R3.1 U1.8
NetR7_1: R7.1 U2.8
NetR10_2: R10.2 SV_CAW1.1 U4.32
NetR25_1: R25.1 U4.12
NetR29_1: R29.1 U4.8
NetR30_1: R30.1 U4.9
NetR31_2: R31.2 S2.1 U4.2
NetR32_1: R32.1 U4.34
NetR33_1: R33.1 U4.46
NetR34_1: R34.1 S3.1 U4.7
NetR35_2: R35.2 U5.5
NetR36_2: R36.2 U6.5
NetR37_2: R37.2 U7.5
NetSPI_1_2: SPI_1.2 U4.17
NetSPI_1_3: SPI_1.3 U5.3
NetSPI_1_4: SPI_1.4 U5.2
NetSPI_2_2: SPI_2.2 U4.31
NetSPI_2_3: SPI_2.3 U6.3
NetSPI_2_4: SPI_2.4 U6.2
NetSPI_3_2: SPI_3.2 U4.44
NetSPI_3_3: SPI_3.3 U7.3
NetSPI_3_4: SPI_3.4 U7.2
NetU1_1: U1.1 U4.71
NetU1_4: U1.4 U4.70
NetU2_1: U2.1 U4.52
NetU2_4: U2.4 U4.51
NetU3_6: U3.6 U4.16
NetU4_1: U4.1 U7.6
NetU4_5: U4.5 U7.7
NetU4_18: U4.18 U5.7
NetU4_47: U4.47 U5.6
NetU4_89: U4.89 U6.6
NetU4_91: U4.91 U6.7
pads on no net: CMC1.4 CMC2.4 EN_BCP.4 EN_BCP.5 EN_ELB.4 EN_ELB.5 EN_TRN.4 EN_TRN.5 H1.0 H2.0 H3.0 H4.0 Incoming_1.4 Incoming_1.5 Incoming_2.4 Incoming_2.5 M_ELB.4 M_ELB.5 M_TRN.4 M_TRN.5 M_WST1.4 M_WST1.5 M_WST2.4 M_WST2.5 Outgoing_1.4 Outgoing_1.5 Outgoing_2.4 Outgoing_2.5 S1.2 S1.3 SV_CAW1.4 SV_CAW1.5 U1.5 U2.5 U3.1 U3.2 U3.5 U3.8 U4.3 U4.15 U4.25 U4.26 U4.29 U4.30 U4.33 U4.35 U4.36 U4.41 U4.43 U4.45 U4.54 U4.66 U4.67 U4.68 U4.69 U4.77 U4.78 U4.79 U4.82 Y1.4

## Polygon pours and split planes (outlines as drawn)
no net on Top Layer (solid, pour order 2): 5125,610
GND on Bottom Layer (solid, pour order 4): 880,5100 7110,5100 7110,670 780,670

## Text inside footprints (layer, text, board x,y; h text height)
CMC1: Top Overlay "2" at 13335.42,2749.17 h59.06 r90; Top Overlay "3" at 12395.42,2769.17 h59.06 r90; Top Overlay "4" at 12395.42,2549.17 h59.06 r90; Top Overlay "1" at 13335.42,1589.17 h59.06 r90; Top Overlay "5" at 12395.42,1569.17 h59.06 r90
CMC2: Top Overlay "2" at 8965,2630 h59.06 r90; Top Overlay "3" at 8025,2650 h59.06 r90; Top Overlay "4" at 8025,2430 h59.06 r90; Top Overlay "1" at 8965,1470 h59.06 r90; Top Overlay "5" at 8025,1450 h59.06 r90